# Altium PCB [CC2538] PCB.PcbDoc
Units mil, origin at the board's own origin, x right, y up, seen from the top; angles counter-clockwise.
Board outline 2400.22 x 2575.34 mil, 2 copper layers (Top Layer, Bottom Layer); 52 components, 70 nets, 222 pads, 19 vias.
Unrouted connection lines stored in the file: 7.
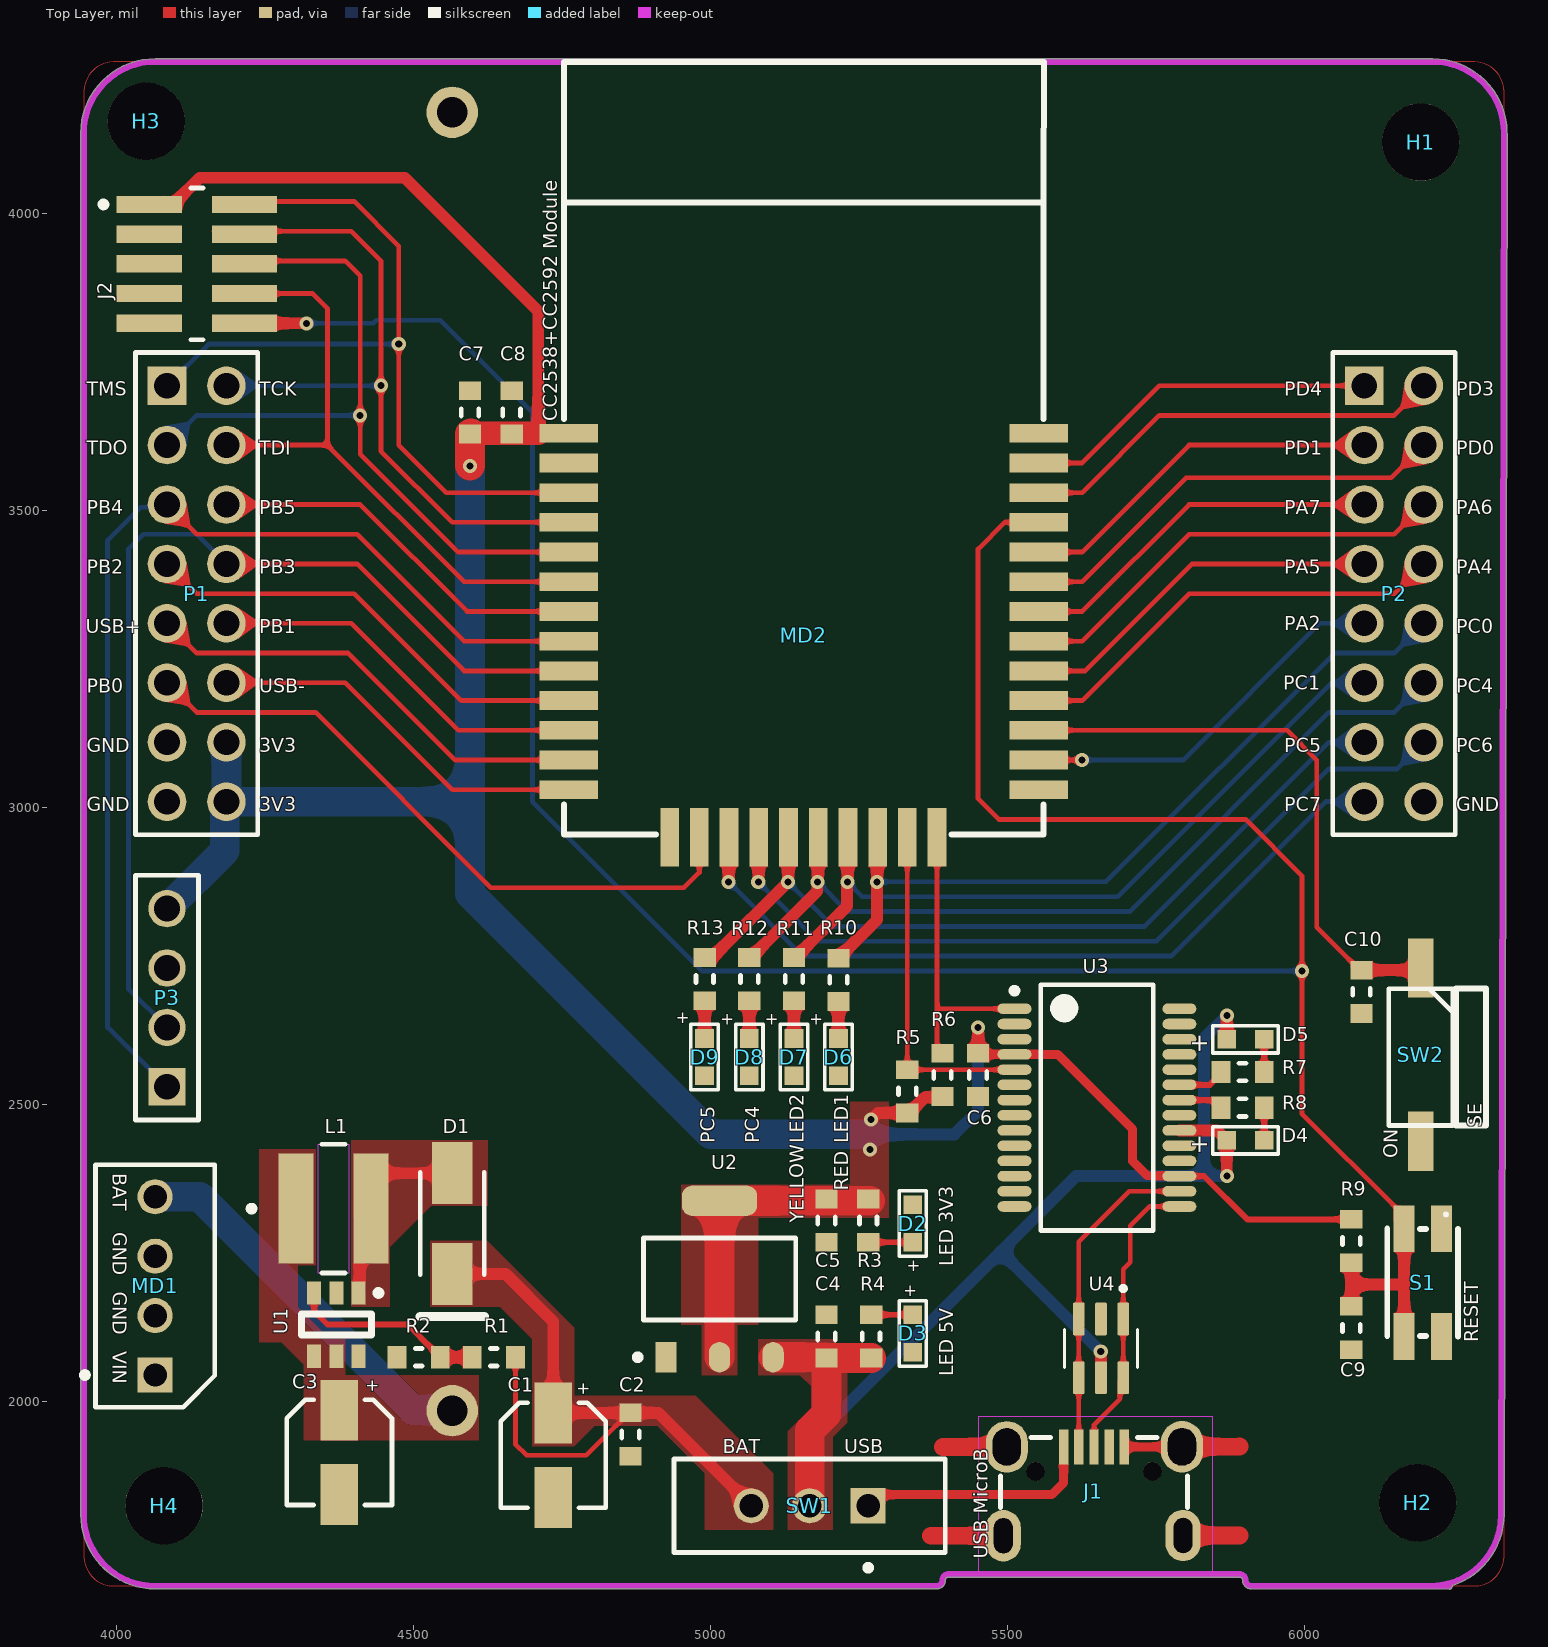
[diagram p0: Top Layer view]
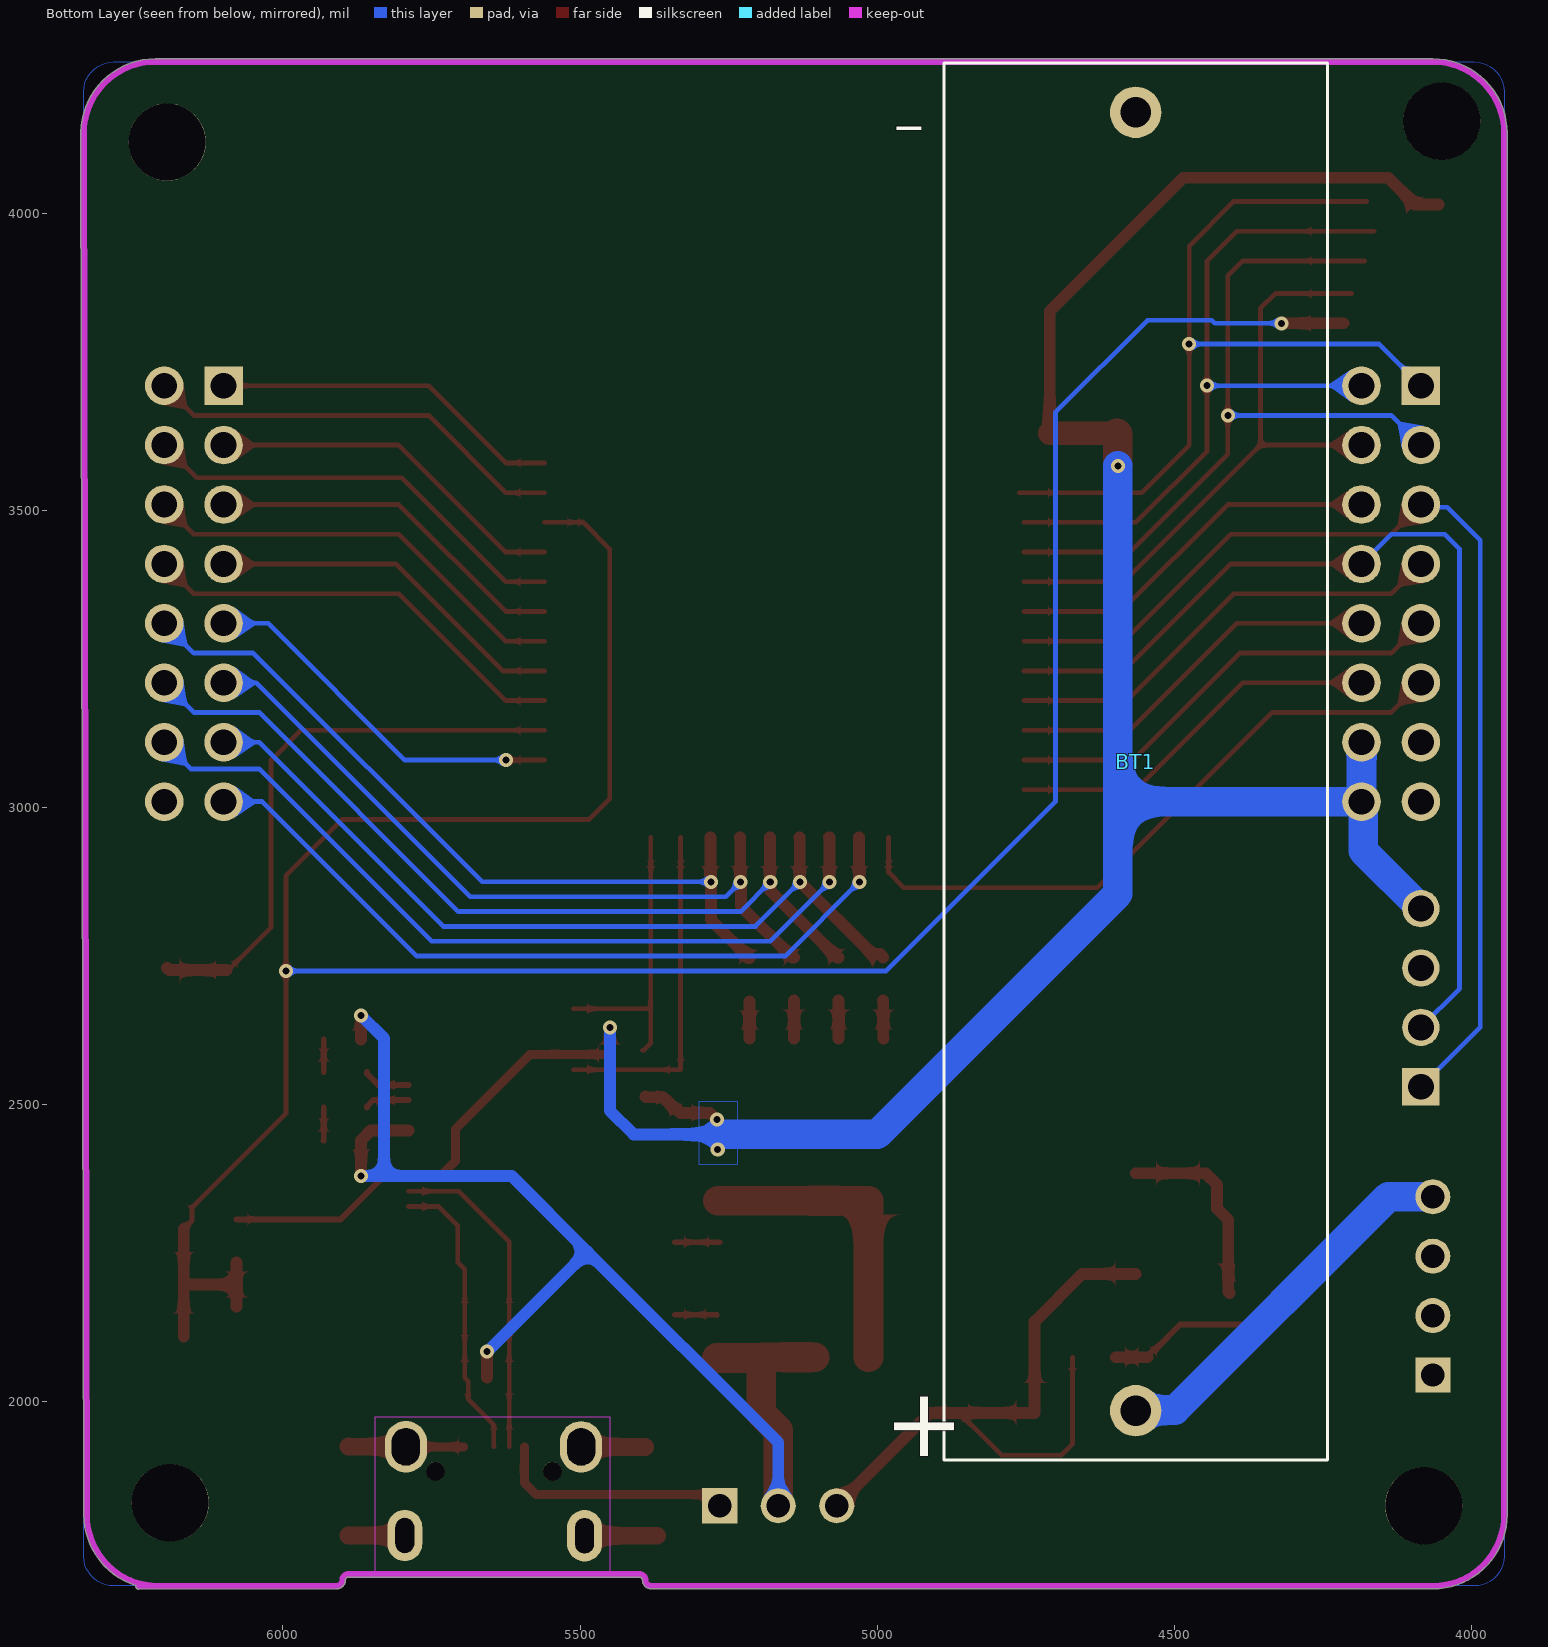
[diagram p1: Bottom Layer view, seen from below]
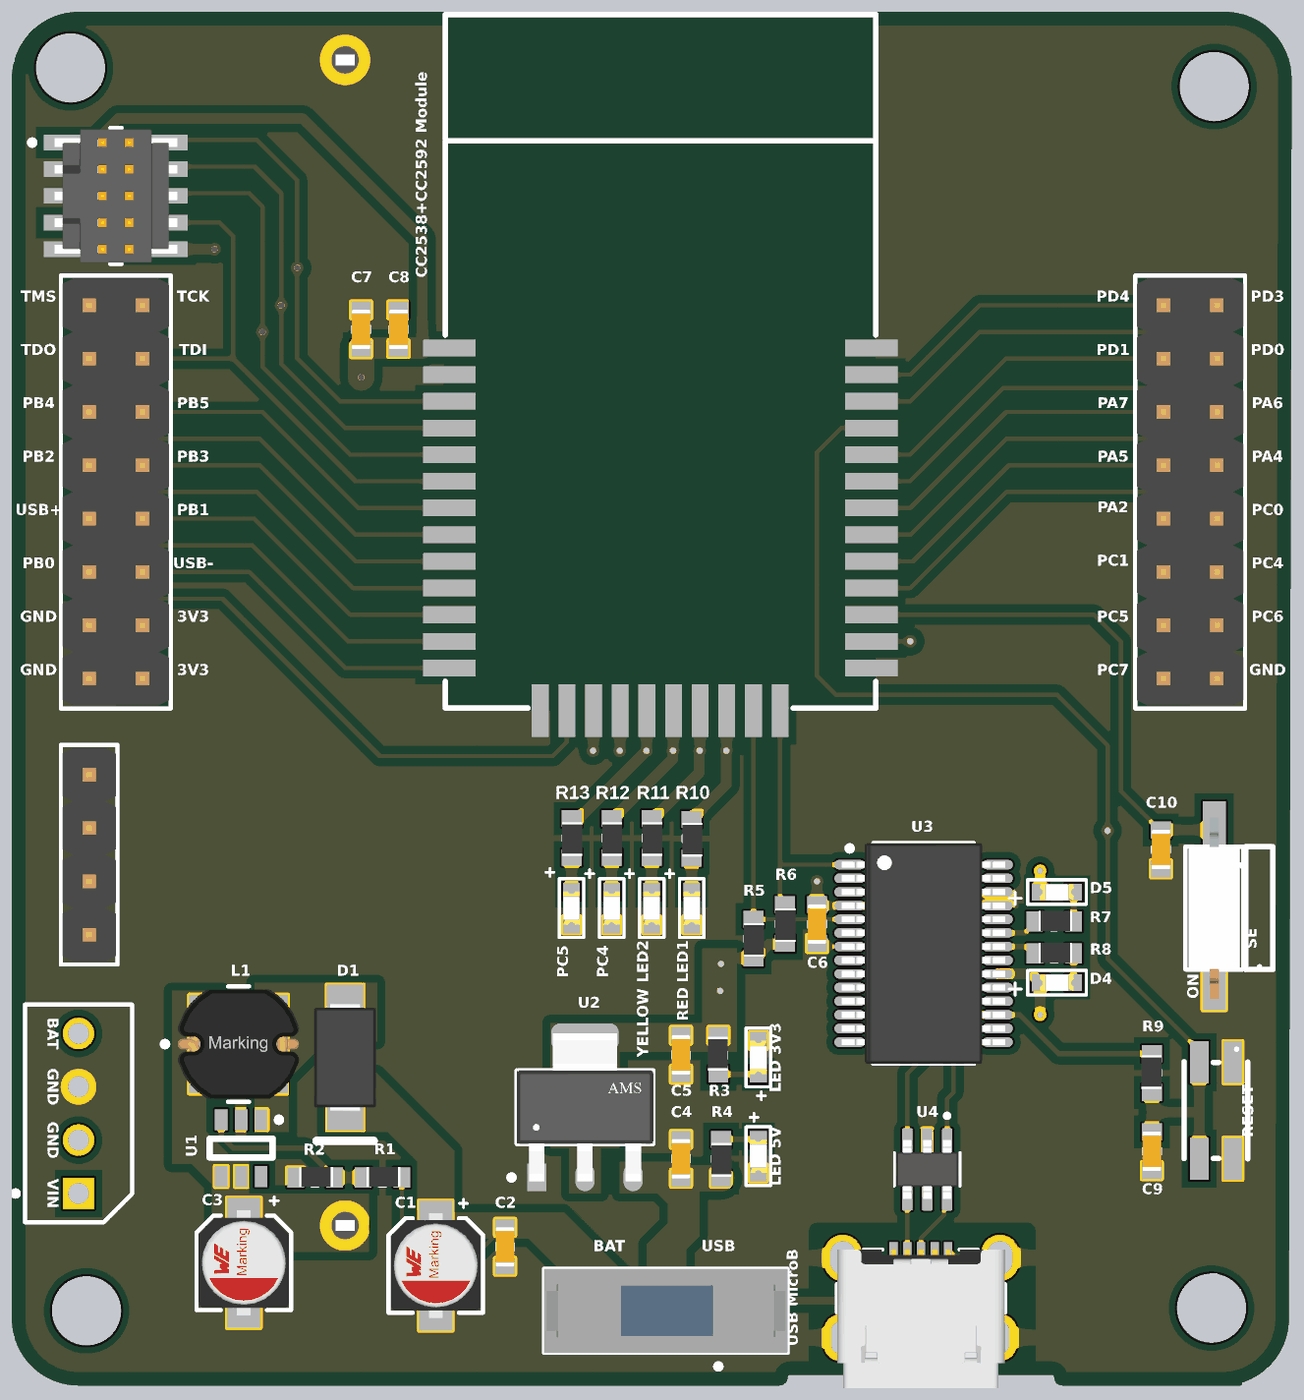
[diagram p2: 3D render of the assembled board from above, using the file's embedded part models]

## Layer stack, top to bottom
Top Solder: solder mask 0.4, Solder Resist, Dk 3.5
Top Layer: signal copper 1.4
Dielectric 1: dielectric 12.6, FR-4, Dk 4.8
Bottom Layer: signal copper 1.4
Bottom Solder: solder mask 0.4, Solder Resist, Dk 3.5

## Board outline
3939.99,1810 ccw(c4065,1810) 4065,1684.98 4065.03,1684.99 5380,1684.98 ccw(c5380,1700) 5395.02,1700 cw(c5400,1700) 5400,1704.98 5890,1704.98 cw(c5890,1700) 5894.98,1700 ccw(c5910,1700) 5909.99,1684.98 6242.61,1684.68 ccw(c6242.61,1689.69) 6247.63,1689.69 6247.52,1690.75 ccw(c6210,1810) 6335.02,1809.99 6340.21,4134.99 6340.01,4136.4 ccw(c6215,4135) 6215,4260.02 4065,4260.02 4064.95,4260.02 ccw(c4065,4135) 3939.99,4135.06 3939.98,4135

## Design rules (kind name [scope] priority, off if disabled: settings)
Clearance Clearance_4 [InNamedPolygon('NONET_L02_P009')] p1: gap=15 ignorepadtopadclearanceinfootprint=FALSE
Clearance Clearance_3 [InNamedPolygon('NONET_L01_P009')] p2: gap=15 ignorepadtopadclearanceinfootprint=FALSE
Clearance Clearance_2 [InNamedPolygon('NONET_L01_P013')] p3: gap=15 ignorepadtopadclearanceinfootprint=FALSE
Clearance Clearance_1 [InNamedPolygon('NONET_L01_P013')] p4: gap=15 ignorepadtopadclearanceinfootprint=FALSE
Clearance [All] p5: gap=6 ignorepadtopadclearanceinfootprint=FALSE
PolygonConnect PolygonConnect_6 [All vs IsNamedPolygon('3V3_L01_P008') Or IsNamedPolygon('5V_BAT_L01_P003') Or IsNamedPolygon('5V_L01_P005') Or IsNamedPolygon('NONET_L01_P013') Or IsNamedPolygon('NETD1_1_L01_P002') Or IsNamedPolygon('VBAT_L01_P001') Or IsNamedPolygon('3V3_L02_P006') Or IsNamedPolygon('NONET_L02_P009')] p1: thpad.connectstyle=Direct thpad.reliefconductorwidth=10 thpad.reliefentries=4 thpad.polygonreliefangle="90 Angle" thpad.airgapwidth=10 smdpad.connectstyle=Direct smdpad.reliefconductorwidth=10 smdpad.reliefentries=4 smdpad.polygonreliefangle="90 Angle" smdpad.airgapwidth=10 via.connectstyle=Relief via.reliefconductorwidth=10 via.reliefentries=4 via.polygonreliefangle="90 Angle" via.airgapwidth=10
PolygonConnect PolygonConnect_5 [All vs IsNamedPolygon('NONET_L01_P013')] p2: thpad.connectstyle=Direct thpad.reliefconductorwidth=10 thpad.reliefentries=4 thpad.polygonreliefangle="90 Angle" thpad.airgapwidth=10 smdpad.connectstyle=Direct smdpad.reliefconductorwidth=10 smdpad.reliefentries=4 smdpad.polygonreliefangle="90 Angle" smdpad.airgapwidth=10 via.connectstyle=Relief via.reliefconductorwidth=10 via.reliefentries=4 via.polygonreliefangle="90 Angle" via.airgapwidth=10
PolygonConnect PolygonConnect_4 [All vs IsNamedPolygon('3V3_L01_P008') Or IsNamedPolygon('5V_BAT_L01_P003') Or IsNamedPolygon('5V_L01_P005') Or IsNamedPolygon('NONET_L01_P013') Or IsNamedPolygon('NETD1_1_L01_P002') Or IsNamedPolygon('VBAT_L01_P000') Or IsNamedPolygon('3V3_L02_P006') Or IsNamedPolygon('NONET_L02_P009')] p3: thpad.connectstyle=Direct thpad.reliefconductorwidth=10 thpad.reliefentries=4 thpad.polygonreliefangle="90 Angle" thpad.airgapwidth=10 smdpad.connectstyle=Direct smdpad.reliefconductorwidth=10 smdpad.reliefentries=4 smdpad.polygonreliefangle="90 Angle" smdpad.airgapwidth=10 via.connectstyle=Relief via.reliefconductorwidth=10 via.reliefentries=4 via.polygonreliefangle="90 Angle" via.airgapwidth=10
PolygonConnect PolygonConnect_3 [All vs IsNamedPolygon('NONET_L01_P013')] p4: thpad.connectstyle=Direct thpad.reliefconductorwidth=10 thpad.reliefentries=4 thpad.polygonreliefangle="90 Angle" thpad.airgapwidth=10 smdpad.connectstyle=Direct smdpad.reliefconductorwidth=10 smdpad.reliefentries=4 smdpad.polygonreliefangle="90 Angle" smdpad.airgapwidth=10 via.connectstyle=Relief via.reliefconductorwidth=10 via.reliefentries=4 via.polygonreliefangle="90 Angle" via.airgapwidth=10
PolygonConnect PolygonConnect_2 [All vs IsNamedPolygon('3V3_L01_P008') Or IsNamedPolygon('5V_BAT_L01_P003') Or IsNamedPolygon('5V_L01_P005') Or IsNamedPolygon('NETD1_1_L01_P002') Or IsNamedPolygon('VBAT_L01_P000')] p5: thpad.connectstyle=Direct thpad.reliefconductorwidth=10 thpad.reliefentries=4 thpad.polygonreliefangle="90 Angle" thpad.airgapwidth=10 smdpad.connectstyle=Direct smdpad.reliefconductorwidth=10 smdpad.reliefentries=4 smdpad.polygonreliefangle="90 Angle" smdpad.airgapwidth=10 via.connectstyle=Relief via.reliefconductorwidth=10 via.reliefentries=4 via.polygonreliefangle="90 Angle" via.airgapwidth=10
PolygonConnect PolygonConnect_1 [All vs IsNamedPolygon('5V_BAT_L01_P003') Or IsNamedPolygon('NETD1_1_L01_P002') Or IsNamedPolygon('VBAT_L01_P000')] p6: thpad.connectstyle=Direct thpad.reliefconductorwidth=10 thpad.reliefentries=4 thpad.polygonreliefangle="90 Angle" thpad.airgapwidth=10 smdpad.connectstyle=Direct smdpad.reliefconductorwidth=10 smdpad.reliefentries=4 smdpad.polygonreliefangle="90 Angle" smdpad.airgapwidth=10 via.connectstyle=Relief via.reliefconductorwidth=10 via.reliefentries=4 via.polygonreliefangle="90 Angle" via.airgapwidth=10
PolygonConnect [All] p7: connectstyle=Relief reliefconductorwidth=10 reliefentries=4 polygonreliefangle="90 Angle" airgapwidth=10
RoutingVias [All] p1: holewidth=28 width=50 viastyle="Through Hole" minholewidth=28 minwidth=50 maxholewidth=28 maxwidth=50
SolderMaskExpansion [All] p1: expansion=4 istentingtop=FALSE
Width [All] p1: maxlimit=50 minlimit=8 preferedwidth=10
30 further rules are at their usual default settings.

## Classes and differential pairs
component class "[CC2538] Power Circuit": BT1 C1 C2 C3 C4 C5 D1 D2 D3 L1 MD1 R1 R2 R3 R4 SW1 U1 U2
component class "[CC2538] MCU": C7 C8 C9 C10 D6 D7 D8 D9 H1 H2 H3 H4 J2 MD2 P1 P2 P3 R9 R10 R11 R12 R13 S1 SW2
component class "[CC2538] Flashing - FTDI": C6 D4 D5 J1 R5 R6 R7 R8 U3 U4

## Components (designator, comment, footprint, x,y, rotation, side; value= is the part's Value field where it differs from the comment)
BT1 "BCAAPC" BCAAC 4560,3087.48 r270 bottom
C1 "865080340003" WCAP-ASLI_D4H5.5 4735,1910 r90 top value=22µF
C2 "0106031051016" CAP_0603 4865,1945 r90 top value=1µF
C3 "865080340003" WCAP-ASLI_D4H5.5 4375,1915 r90 top value=22µF
C4 "0106031061010" CAP_0603 5195,2110 r270 top value=10µF
C5 "0106031061010" CAP_0603 5195,2305 r90 top value=10µF
C6 "0106031041050" CAP_0603 5450,2550 r90 top value=100nF
C7 "0106031051016" CAP_0603 4595,3665 r270 top value=1µF
C8 "0106031041050" CAP_0603 4665,3665 r270 top value=100nF
C9 "0106031041050" CAP_0603 6078.09,2124.13 r270 top value=100nF
C10 "0106031041050" CAP_0603 6095,2690 r270 top value=100nF
D1 "SS210" SS210-Footprint-SMA 4565,2300 r270 top
D2 "160603GreenBlur" WL-SMCW_0603_H=0.7mm#1 5340,2300 r270 top value="Green, 3.2V"
D3 "160603GreenBlur" WL-SMCW_0603_H=0.7mm#1 5340,2115 r90 top value="Green, 3.2V"
D4 "160603GreenBlur" WL-SMCW_0603_H=0.7mm#1 5900,2440 r180 top value="Green, 3.2V"
D5 "160603GreenBlur" WL-SMCW_0603_H=0.7mm#1 5900,2610 r180 top value="Green, 3.2V"
D6 "160603RedClear" WL-SMCW_0603_H=0.7mm#1 5215,2580 r90 top value="Red, 2V"
D7 "160603YellowClear" WL-SMCW_0603_H=0.7mm#1 5140,2580 r90 top value="Yellow, 2V"
D8 "160603GreenClear" WL-SMCW_0603_H=0.7mm#1 5065,2580 r90 top value="Green, 3.2V"
D9 "160610OrangeClear" WL-SMCW_0603_H=0.7mm#2 4990,2580 r90 top
H1 "Tooling Hole 3mm" 3mm 6195,4120 r0 top
H2 "Tooling Hole 3mm" 3mm 6190,1830 r0 top
H3 "Tooling Hole 3mm" 3mm 4050,4155 r0 top
H4 "Tooling Hole 3mm" 3mm 4080,1825 r0 top
J1 "629105150521" 629105150521 5645,1810 r0 top
J2 "FTSH-105-01-L-DV-K-P-TR" FP-FTSH-105-01-L-DV-K-P-T-MFG 4135.12,3915 r270 top
L1 "78477410" "WE-PD2A_4D28 (4730)" 4365,2325 r0 top
MD1 "LI-ION_BATT_CHARGER_CN3791" LI-ION_BATT_CHARGER_CN3791-Footprint-1 4065,2195 r270 top
MD2 "WAVGAT-CC2538-CC2592" WAVGAT-CC2538-CC2592-Footprint 4752.91,2955 r0 top
P1 "61301621121" 61301621121 4135,3360 r270 top value="3A, 250 V (AC)"
P2 "61301621121" 61301621121 6150,3360 r270 top value="3A, 250 V (AC)"
P3 "61300411121" 61300411121 4085,2680 r90 top value="3A, 250 V (AC)"
R1 "0006032231" RES_0603 4635,2075 r0 top value=22k
R2 "0006033121" RES_0603 4508.58,2075 r0 top value=3.1k
R3 "0006031021" RES_0603 5265,2305 r90 top value=1k
R4 "0006031021" RES_0603 5270,2110 r270 top value=1k
R5 "0006031031" RES_0603 5330.91,2522.56 r270 top value=10k
R6 "0006031031" RES_0603 5390,2550 r270 top value=10k
R7 "0006031021" RES_0603 5895,2555 r0 top value=1k
R8 "0006031021" RES_0603 5895,2495 r0 top value=1k
R9 "0006031031" RES_0603 6078.09,2270.55 r90 top value=10k
R10 "0006031021" RES_0603 5215,2710 r270 top value=1k
R11 "0006031021" RES_0603 5140,2711.42 r270 top value=1k
R12 "0006031021" RES_0603 5065,2711.42 r270 top value=1k
R13 "0006031021" RES_0603 4990,2711.42 r270 top value=1k
S1 "Tactile Switch-3x4x2.5" "Tactile Switch-3x4x2.5 Footprint" 6198.5,2200.55 r90 top
SW1 "EG1218" ESWI-EG1218_V 5166.57,1825 r180 top locked
SW2 "Dip Switch 1 2.54" "Dip Switch 1 2.54-Footprint-1" 6195,2580 r180 top locked
U1 "MT3608" SOT95P280X145-6N 4370,2130 r270 top
U2 "AMS1117-3.3" FP-AMS1117-IPC_B 5014.84,2206.69 r90 top
U3 "FT232RL-REEL" FTDI-SSOP-28_L 5650,2495 r0 top
U4 "USBLC6-2SC6" USBLC6-2SC6-Footprint-1 5656.81,2090 r270 top

## Footprints (in the part's own frame and the unit in brackets; to place one, negate y for a bottom-side part, rotate by r counter-clockwise, add the part's x,y. Pads: shape width x height; smd on the part's side, far side on the other; paste and mask are expansions set on the pad)
3mm [mm]
  round 3.3 hole 3.3 unplated: 0(0,0)
61300411121 [mm] "Pin Header, pitch 2.54 mm, THT, Vertical, single row, 4p"
  rect 1.6x1.6 hole 1.1: 1(-3.81,0)
  round 1.6 hole 1.1: 2(-1.27,0) 3(1.27,0) 4(3.81,0)
  silkscreen extent -5.23,-1.35 5.23,1.35, body extent -5.08,-1.27 5.08,1.27, height 8.57
61301621121 [mm] "Pin Header, pitch 2.54 mm, THT, Vertical, dual row, 16p"
  rect 1.65x1.65 hole 1.1: 1(-8.89,-1.27)
  round 1.65 hole 1.1: 2(-8.89,1.27) 3(-6.35,-1.27) 4(-6.35,1.27) 5(-3.81,-1.27) 6(-3.81,1.27) 7(-1.27,-1.27) 8(-1.27,1.27) 9(1.27,-1.27) 10(1.27,1.27) 11(3.81,-1.27) 12(3.81,1.27) 13(6.35,-1.27) 14(6.35,1.27) 15(8.89,-1.27) 16(8.89,1.27)
  silkscreen extent -10.31,-2.62 10.31,2.62, body extent -10.16,-2.54 10.16,2.54, height 8.59
629105150521 [mm]
  rect 0.4x1.5 smd: 1(-1.3,2.9) 2(-0.65,2.9) 3(0,2.9) 4(0.65,2.9) 5(1.3,2.9)
  round 0.8 hole 0.8 unplated: MH1(-2.5,1.85) MH2(2.5,1.85)
  oval 1.5x2.2 hole 0.8 slot 1.5 at 90 deg: Shell(-3.875,-0.9) Shell(3.81,-0.889)
  oval 1.8x2.2 hole 1.2 slot 1.6 at 90 deg: Shell(-3.725,2.9) Shell(3.763,2.903)
  silkscreen extent -4,0.3 4,3.3, body extent -4,-3.3 4,3.3, height 2.75
BCAAC [mm] "Battery Holder (Open) AA 1 Cell PC Pin"
  round 2.2 hole 1.3: 1(28.004,-0.127) 2(-27.496,-0.127)
  silkscreen extent -29.6,-8.33 30.1,8.07, body extent -29.6,-8.33 30.1,8.07, height 13.25
CAP_0603 [mm] "Chip Capacitor, 2-Leads, Body 1.80x0.80mm, IPC Medium Density"
  rect 0.8x0.95 smd: 1(-0.925,0) 2(0.925,0)
  silkscreen extent -0.15,-0.38 0.15,0.38, body extent -0.95,-0.45 0.95,0.45, height 0.9
"Dip Switch 1 2.54-Footprint-1" [mm]
  rect 1.1x2.54 smd: 1(0,-3.81) 2(0,3.59)
  silkscreen extent -1.37,-2.93 1.37,2.93, body extent -1.22,-4.32 1.22,4.32, height 2.65
ESWI-EG1218_V [mm] "THD, 3-Leads, Body 11.6x4mm, Pitch 2.5mm"
  rect 1.5x1.5 hole 1: 1(-2.5,0)
  round 1.5 hole 1: 2(0,0) 3(2.5,0)
  silkscreen extent -5.8,-2 5.8,2.77, body extent -5.8,-2 5.8,2, height 7.4
FP-AMS1117-IPC_B [mm]
  rect 1.304x0.912 smd paste+0 mask+0: 1(-3.345,2.29)
  rrect100% 1.304x0.912 smd paste+0 mask+0: 2(-3.345,0) 3(-3.345,-2.29)
  rrect70% 1.304x3.222 smd paste+0 mask+0: 4(3.345,0)
  silkscreen extent -3.47,-3.25 1.75,3.62, body extent -4.25,-3.5 4.25,3.5, height 0.25
FP-FTSH-105-01-L-DV-K-P-T-MFG [mm]
  rect 0.74x2.79 smd paste+0 mask+0: 1(-2.54,-2.035) 2(-2.54,2.035) 3(-1.27,-2.035) 4(-1.27,2.035) 5(0,-2.035) 6(0,2.035) 7(1.27,-2.035) 8(1.27,2.035) 9(2.54,-2.035) 10(2.54,2.035)
  silkscreen extent -3.24,-4.11 3.24,0.27, body extent -3.34,-3.53 3.34,3.53, height 0.25
FTDI-SSOP-28_L [mm] "SOP, 28-Leads, Body 10.5x5.6mm, Pitch 0.65mm, IPC High Density"
  oval 1.45x0.45 smd: 1(-3.525,4.225) 2(-3.525,3.575) 3(-3.525,2.925) 4(-3.525,2.275) 5(-3.525,1.625) 6(-3.525,0.975) 7(-3.525,0.325) 8(-3.525,-0.325) 9(-3.525,-0.975) 10(-3.525,-1.625) 11(-3.525,-2.275) 12(-3.525,-2.925) 13(-3.525,-3.575) 14(-3.525,-4.225) 15(3.525,-4.225) 16(3.525,-3.575) 17(3.525,-2.925) 18(3.525,-2.275) 19(3.525,-1.625) 20(3.525,-0.975) 21(3.525,-0.325) 22(3.525,0.325) 23(3.525,0.975) 24(3.525,1.625) 25(3.525,2.275) 26(3.525,2.925) 27(3.525,3.575) 28(3.525,4.225)
  silkscreen extent -3.65,-5.25 2.4,5.25, body extent -3.9,-5.25 3.9,5.25, height 2
LI-ION_BATT_CHARGER_CN3791-Footprint-1 [mm]
  rect 1.5x1.5 hole 1: 1(3.81,0)
  round 1.5 hole 1: 2(1.27,0) 3(-1.27,0) 4(-3.81,0)
  silkscreen extent -5.18,-3.12 5.18,2.55
RES_0603 [mm] "Chip Resistor, 2-Leads, Body 1.55x0.85mm, IPC Medium Density"
  rect 0.8x0.95 smd: 1(-0.925,0) 2(0.925,0)
  silkscreen extent -0.15,-0.38 0.15,0.38, body extent -0.75,-0.45 0.85,0.5, height 0.5
SOT95P280X145-6N [mm] "SOT23, 6-Leads, Body 2.90x2.80mm, Pitch 0.95mm, IPC Medium Density"
  rect 1x0.6 smd: 1(-1.35,0.95) 2(-1.35,0) 3(-1.35,-0.95) 4(1.35,-0.95) 5(1.35,0) 6(1.35,0.95)
  silkscreen extent -1.47,-1.5 0.45,1.93, body extent -0.85,-1.5 0.85,1.5, height 1.45
SS210-Footprint-SMA [mm]
  rect 2.65x1.75 smd: 1(-2.15,0) 2(2.15,0)
  silkscreen extent -2.19,-1.36 3.98,1.36, body extent -2.6,-1.48 2.6,1.48, height 2.7
"Tactile Switch-3x4x2.5 Footprint" [mm]
  rect 2x0.9 smd: 1(-2.3,0.8) 2(2.3,0.8) 3(2.3,-0.8) 4(-2.3,-0.8)
  silkscreen extent -2.3,-1.5 2.31,1.52
USBLC6-2SC6-Footprint-1 [mm]
  rrect25% 1.4x0.5 smd: 1(-1.255,0.95) 2(-1.255,0) 3(-1.255,-0.95) 4(1.255,-0.95) 5(1.255,0) 6(1.255,0.95)
  silkscreen extent -2.65,-1.57 0.81,1.57, body extent -1.4,-1.46 1.4,1.46, height 1.44
WAVGAT-CC2538-CC2592-Footprint [mm]
  rect 2.5x0.8 smd paste+0 mask+0: 1(0.2,17.145) 2(0.2,15.875) 3(0.2,14.605) 4(0.2,13.335) 5(0.2,12.065) 6(0.2,10.795) 7(0.2,9.525) 8(0.2,8.255) 9(0.2,6.985) 10(0.2,5.715) 11(0.2,4.445) 12(0.2,3.175) 13(0.2,1.905) 24(20.3,1.905) 25(20.3,3.175) 26(20.3,4.445) 27(20.3,5.715) 28(20.3,6.985) 29(20.3,8.255) 30(20.3,9.525) 31(20.3,10.795) 32(20.3,12.065) 33(20.3,13.335) 34(20.3,14.605) 35(20.3,15.875) 36(20.3,17.145)
  rect 0.8x2.5 smd paste+0 mask+0: 14(4.521,-0.127) 15(5.791,-0.127) 16(7.061,-0.127) 17(8.331,-0.127) 18(9.601,-0.127) 19(10.871,-0.127) 20(12.141,-0.127) 21(13.411,-0.127) 22(14.681,-0.127) 23(15.951,-0.127)
  silkscreen extent 0,0 20.51,33.02
WCAP-ASLI_D4H5.5 [mm] "Aluminium Electrolytic V-Chip SMT Capacitors, 4x5.5mm"
  rect 2.6x1.6 smd: 1(1.8,0) 2(-1.8,0)
  silkscreen extent -2.25,-2.25 2.25,2.25, body extent -2.5,-2.15 2.5,2.15, height 5.5
"WE-PD2A_4D28 (4730)" [mm]
  rect 1.5x4.7 smd: 1(-1.6,0) 2(1.6,0)
  Top Layer keep-out region: -0.65,2.75 0.65,2.75 0.65,-2.75 -0.65,-2.75
  silkscreen extent -3.62,-2.75 0.5,2.75, body extent -2.9,-2.6 2.89,2.6, height 4.5
WL-SMCW_0603_H=0.7mm#1 [mm] "SMD Mono-color Chip LED, body 1.6x0.8mm"
  rect 0.8x0.8 smd: 1(-0.8,0) 2(0.8,0)
  silkscreen extent -1.4,-0.58 1.4,0.58, body extent -0.8,-0.4 0.8,0.4, height 0.7
WL-SMCW_0603_H=0.7mm#2 [mm] "SMD Mono-color Chip LED, body 1.6x0.8mm"
  rect 0.8x0.8 smd: 1(-0.8,0.008) 2(0.8,0.008)
  silkscreen extent -1.4,-0.58 1.4,0.59, body extent -0.8,-0.39 0.8,0.41, height 0.7

## Part data
BT1: library part CMP-00029-00002-3, "Battery Holder (Open) AA 1 Cell PC Pin", Supplier Locally Name=Thegioiic, Supplier Locally URL=https://www.thegioiic.com/hop-pin-1xaa-xuyen-lo-han-pcb
C1 C3: library part CMP-001-00129-2, "V-Chip, D4 x H5.5mm, 22uF, 16V", Capacitance Tolerance=+/-20%, Leakage Current=3.52uA, Manufacturer="Wurth Elektronik", Manufacturer Part Number=N/A, Operating Temperature Max=105°C, Operating Temperature Min=-55°C, Rated Voltage (DC)=16V, Ripple Current=90mA, Category="Aluminum Electrolytic Capacitors", Component Type=Standard, Design Item ID=865080340003, Diameter=4mm, Dissipation Factor=16%, Endurance=2000h, Height=5.5mm, Mount="Surface Mount", Packaging="Tape and Reel", Pins=2, Source=Al_Cap.SchLib, Supplier 1 Name=Mouser, Supplier 1 SN=710-865080340003, Supplier 1 URL=https://www.mouser.com/ProductDetail/Wurth-Elektronik/865080340003?qs=0KOYDY2FL2%252BowmC4S50IuQ%3D%3D, Supplier 2 Name=Digi-Key, Supplier 2 SN=N/A, Supplier 2 URL=N/A, Supplier 3 Name=thegioiic, Supplier 3 SN=N/A, Supplier 3 URL=https://www.thegioiic.com/tu-nhom-smd-22uf-16v-4x5-4mm
C2 C7: library part CMP-001-00177-2, "CAP, size 0603, 1 uF, 16 VDC, 10%", Case/Package=0603, LCSC Part #=C1592, Manufacturer="Samsung Electro-Mechanics", Manufacturer Part Number=CL10B105KO8NNWC, Operating Temperature Max="+ 85 C", Operating Temperature Min="- 40 C", Supplier 1 Part Number=187-CL10B105KO8NNWC, Supplier 2 Part Number=1276-CL10B105KO8NNWCTR-ND, Supplier 3 Part Number=N/A, Tolerance=10%, Voltage Rating DC="16 VDC", Component Type=Standard, ComponentLink1Description=Datasheet, ComponentLink1URL=https://www.mouser.vn/datasheet/2/585/Samsung_MLCC_1837944-1929650.pdf, Design Item ID=0106031051016, Mount=SMD/SMT, Packaging="Tape and Reel", Pins=2, Source=Capacitor_0603_10_percent.SchLib, Supplier 1 URL=https://www.mouser.vn/ProductDetail/Samsung-Electro-Mechanics/CL10B105KO8NNWC?qs=81r%252BiQLm7BT%252BXtc72qn1ug%3D%3D&utm_source=mouser-refine-download&utm_medium=file&utm_campaign=CL10B105KO8NNWC&utm_content=Samsung-Electro-Mechanics, Supplier 2 URL=https://www.digikey.com/en/products/detail/samsung-electro-mechanics/cl10b105ko8nnwc/16572783, Supplier 3 URL=https://www.thegioiic.com/tu-gom-0603-1uf-16v
C4 C5: library part CMP-001-00181-2, "CAP, size 0603, 10 uF, 10 VDC, 10%", Case/Package=0603, LCSC Part #=C19702, Manufacturer="Samsung Electro-Mechanics", Manufacturer Part Number=CL10A106KP8NNNC, Operating Temperature Max="+ 85 C", Operating Temperature Min="- 40 C", Supplier 1 Part Number=187-CL10A106KP8NNNC, Supplier 2 Part Number=1276-1192-2-ND, Supplier 3 Part Number=N/A, Tolerance=10%, Voltage Rating DC="10 VDC", Component Type=Standard, ComponentLink1Description=Datasheet, ComponentLink1URL=https://www.mouser.vn/datasheet/2/585/MLCC-1837944.pdf, Design Item ID=0106031061010, Mount=SMD/SMT, Packaging="Tape and Reel", Pins=2, Source=Capacitor_0603_10_percent.SchLib, Supplier 1 URL=https://www.mouser.vn/ProductDetail/Samsung-Electro-Mechanics/CL10A106KP8NNNC?qs=X6jEic%2FHinAlyfRHj7fKwg%3D%3D, Supplier 2 URL=https://www.digikey.com/en/products/detail/samsung-electro-mechanics/cl10a106kp8nnnc/3886850, Supplier 3 URL=https://www.thegioiic.com/tu-gom-0603-10uf-25v
C6 C8 C9 C10: library part CMP-001-00176-2, "CAP, size 0603, 100 nF, 50 VDC, 10%", Case/Package=0603, LCSC Part #=C14663, Manufacturer=TDK, Manufacturer Part Number=CGA3E3X8R1H104K080AE, Operating Temperature Max="+ 85 C", Operating Temperature Min="- 40 C", Supplier 1 Part Number=810-CGA3E3X8R1H104KA, Supplier 2 Part Number=445-173697-2-ND, Supplier 3 Part Number=N/A, Tolerance=10%, Voltage Rating DC="50 VDC", Component Type=Standard, ComponentLink1Description=Datasheet, ComponentLink1URL=https://product.tdk.com/system/files/dam/doc/product/capacitor/ceramic/mlcc/catalog/mlcc_automotive_soft_en.pdf?ref_disty=mouser, Design Item ID=0106031041050, Mount=SMD/SMT, Packaging="Tape and Reel", Pins=2, Source=Capacitor_0603_10_percent.SchLib, Supplier 1 URL=https://www.mouser.com/ProductDetail/TDK/CGA3E3X8R1H104K080AE?qs=nQSIdc08i%252Bd8g3IRRgU2bw%3D%3D&utm_source=mouser-refine-download&utm_medium=file&utm_campaign=CGA3E3X8R1H104K080AE&utm_content=TDK, Supplier 2 URL=https://www.digikey.com/en/products/detail/tdk-corporation/cga3e3x8r1h104k080ae/5809262, Supplier 3 URL=https://www.thegioiic.com/tu-gom-0603-100nf-0-1uf-50v
D1: library part CMP-004-00056-1, "Rectifier Diode, Schottky, 1 Phase, 1 Element, 1.5A, 100V V(RRM), Silicon, DO-214AA", Forward Voltage=430mV, Max Operating Temperature=150°C, Min Operating Temperature=-55°C, Pins=2, RoHS Compliant=Yes
D2 D3 D4 D5: library part CMP-004-00033-2, "WL-SMCW SMT Mono-color Chip LED Blur, size 0603, Green, 3.2V, 140deg", Color=Green, Component Type=Standard, ComponentLink1Description="Datasheet link", ComponentLink1URL=N/A, ComponentLink2Description="Supplier 1 URL", ComponentLink2URL=https://www.mouser.vn/ProductDetail/ROHM-Semiconductor/SMLD12EN1WT86?qs=qSfuJ%252Bfl%2Fd4fR%252B9yZydIwg%3D%3D, ComponentLink3Description="Supplier 2 URL", ComponentLink3URL=https://www.digikey.com/en/products/detail/rohm-semiconductor/SML-D12M8WT86/1641797, ComponentLink4Description="Supplier 3 URL", ComponentLink4URL=N/A, Design Item ID=160603GreenBlur, Pins=2, Size=0603, Source=WL-SMCW_0603.SchLib, Supplier 1 Name=Mouser, Supplier 1 SN=755-SMLD12EN1WT86, Supplier 1 URL=https://www.mouser.vn/ProductDetail/ROHM-Semiconductor/SMLD12EN1WT86?qs=qSfuJ%252Bfl%2Fd4fR%252B9yZydIwg%3D%3D, Supplier 2 Name=Digi-Key, Supplier 2 SN=511-1578-2-ND, Supplier 2 URL=https://www.digikey.com/en/products/detail/rohm-semiconductor/SML-D12M8WT86/1641797, Supplier 3 Name=ICDayRoi, Supplier 3 SN=N/A, Supplier 3 URL=N/A, Type=Blur
D6: library part CMP-004-00038-2, "WL-SMCW SMT Mono-color Chip LED Waterclear, size 0603, Red, 2V, 140deg", Color=Red, Component Type=Standard, ComponentLink1Description="Datasheet link", ComponentLink1URL=N/A, ComponentLink2Description="Supplier 1 URL", ComponentLink2URL=https://www.mouser.vn/ProductDetail/Wurth-Elektronik/150060RS75000?qs=LlUlMxKIyB3QnmZ3fw%2FVCA%3D%3D, ComponentLink3Description="Supplier 2 URL", ComponentLink3URL=https://www.digikey.com/en/products/detail/liteon/LTST-C191KRKT/386837, ComponentLink4Description="Supplier 3 URL", ComponentLink4URL=https://www.thegioiic.com/led-do-0603-dan-smd-trong-suot, Design Item ID=160603RedClear, Pins=2, Size=0603, Source=WL-SMCW_0603.SchLib, Supplier 1 Name=Mouser, Supplier 1 SN=710-150060RS75000, Supplier 1 URL=https://www.mouser.vn/ProductDetail/Wurth-Elektronik/150060RS75000?qs=LlUlMxKIyB3QnmZ3fw%2FVCA%3D%3D, Supplier 2 Name=Digi-Key, Supplier 2 SN=160-1447-2-ND, Supplier 2 URL=https://www.digikey.com/en/products/detail/liteon/LTST-C191KRKT/386837, Supplier 3 Name=ICDayRoi, Supplier 3 SN=N/A, Supplier 3 URL=https://www.thegioiic.com/led-do-0603-dan-smd-trong-suot, Type=Clear
D7: library part CMP-004-00042-2, "WL-SMCW SMT Mono-color Chip LED Waterclear, size 0603, Yellow, 2V, 140deg", Color=Yellow, Component Type=Standard, ComponentLink1Description="Datasheet link", ComponentLink1URL=N/A, ComponentLink2Description="Supplier 1 URL", ComponentLink2URL=https://www.mouser.com/ProductDetail/Wurth-Elektronik/150060YS75003?qs=Li%252BoUPsLEnvfob7qsAi9dA%3D%3D, ComponentLink3Description="Supplier 2 URL", ComponentLink3URL=https://www.digikey.com/en/products/detail/liteon/LTST-C191KSKT/386839, ComponentLink4Description="Supplier 3 URL", ComponentLink4URL=https://icdayroi.com/led-yellow-0603, Design Item ID=160603YellowClear, Pins=2, Size=0603, Source=WL-SMCW_0603.SchLib, Supplier 1 Name=Mouser, Supplier 1 SN=710-150060YS75003, Supplier 1 URL=https://www.mouser.com/ProductDetail/Wurth-Elektronik/150060YS75003?qs=Li%252BoUPsLEnvfob7qsAi9dA%3D%3D, Supplier 2 Name=Digi-Key, Supplier 2 SN=160-1448-2-ND, Supplier 2 URL=https://www.digikey.com/en/products/detail/liteon/LTST-C191KSKT/386839, Supplier 3 Name=ICDayRoi, Supplier 3 SN=N/A, Supplier 3 URL=https://icdayroi.com/led-yellow-0603, Type=Clear
D8: library part CMP-004-00034-2, "WL-SMCW SMT Mono-color Chip LED Waterclear, size 0603, Green, 3.2V, 140deg", Color=Green, Component Type=Standard, ComponentLink1Description="Datasheet link", ComponentLink1URL=N/A, ComponentLink2Description="Supplier 1 URL", ComponentLink2URL=https://www.mouser.vn/ProductDetail/Wurth-Elektronik/150060GS75000?qs=LlUlMxKIyB0UYkq5lDO8nA%3D%3D, ComponentLink3Description="Supplier 2 URL", ComponentLink3URL=https://www.digikey.com/en/products/detail/liteon/LTST-C191KGKT/386835, ComponentLink4Description="Supplier 3 URL", ComponentLink4URL=https://www.thegioiic.com/led-xanh-la-0603-dan-smd-trong-suot, Design Item ID=160603GreenClear, Pins=2, Size=0603, Source=WL-SMCW_0603.SchLib, Supplier 1 Name=Mouser, Supplier 1 SN=710-150060GS75000, Supplier 1 URL=https://www.mouser.vn/ProductDetail/Wurth-Elektronik/150060GS75000?qs=LlUlMxKIyB0UYkq5lDO8nA%3D%3D, Supplier 2 Name=Digi-Key, Supplier 2 SN=160-1446-2-ND, Supplier 2 URL=https://www.digikey.com/en/products/detail/liteon/LTST-C191KGKT/386835, Supplier 3 Name=ICDayRoi, Supplier 3 SN=N/A, Supplier 3 URL=https://www.thegioiic.com/led-xanh-la-0603-dan-smd-trong-suot, Type=Clear
D9: library part CMP-007-00036-1, Colour=Orange
H1 H2 H3 H4: library part CMP-034-000004-2, Component Type="Standard (No BOM)", Design Item ID="Tooling Hole 3mm", Pin Count=0, Source=Hole.SchLib
J1: library part CMP-002-00305-4, "Micro USB 2.0 Type B Receptacle WR-COM, Horizontal, SMT, with Pegs, High Current at Pin 1 & Pin 5"
J2: library part CMP-002-00347-1, "JTAG Connector - Board Connector, 10 Contact(s), 2 Row(s), Male, Straight, 0.05 inch Pitch, Surface Mount Terminal, Locking", Connector Type="BOARD CONNECTOR", Mounting Technology=Board, RoHS Compliant=Yes
L1: library part CMP-006-00021-3, "General Purpose Inductor", RoHS Compliant=Yes
MD1: library part CMP-00029-00007-6, "CN3791 MPPT solar charge controller module uses the CN3791 IC which’s a pulse width modulated switch-mode lithium-ion battery charge controller that can be powered by a photovoltaic cell with maximum power point tracking function"
MD2: library part CMP-021-00009-2, "WAVGAT-CC2538-CC2592 Module"
P1 P2: library part CMP-002-01084-1, "WR-PHD Pin Header, THT, pitch 2.54mm, Dual Row, Vertical, 16p", Contact Resistance=20mOhm, LCSC Part #=N/A, Manufacturer="Wurth Elektronik", Operating Temperature Max="+ 85 C", Operating Temperature Min="- 25 C", Rated Current=3A, Supplier 1 Part Number=710-61301621121, Withstanding Voltage=500VAC, Working Voltage=250VAC, Component Type=Standard, ComponentLink1Description=Datasheet, ComponentLink1URL=https://www.we-online.com/catalog/datasheet/61301621121.pdf, Design Item ID=61301621121, Gender="Pin Header", Manufacturer Part Number=61301621121, Mount=THT, Orientation=Vertical, Packaging=Bag, Pin Number=16, Pins=16, Pitch=2.54mm, Published Date="May 2020", Row Number=Dual, Source="WR-PHD_Pin Header_2.54mm.SchLib", Supplier 1 URL=https://www.mouser.vn/ProductDetail/Wurth-Elektronik/61301621121?qs=PhR8RmCirEZBHI%2Fm2diuGA%3D%3D, Supplier 2 Part Number=N/A, Supplier 2 URL=N/A, Supplier 3 Part Number=N/A, Supplier 3 URL=https://www.thegioiic.com/hang-rao-duc-doi-2-54mm-16-chan-2-hang-cao-11-2mm-xuyen-lo
P3: library part CMP-002-01000-1, "WR-PHD Pin Header, THT, pitch 2.54mm, Single Row, Vertical, 4p", Contact Resistance=20mOhm, LCSC Part #=N/A, Manufacturer="Wurth Elektronik", Operating Temperature Max="+ 85 C", Operating Temperature Min="- 25 C", Rated Current=3A, Supplier 1 Part Number=710-61300311121, Withstanding Voltage=500VAC, Working Voltage=250VAC, Component Type=Standard, ComponentLink1Description=Datasheet, ComponentLink1URL=https://www.we-online.com/catalog/datasheet/61300411121.pdf, Design Item ID=61300411121, Gender="Pin Header", Manufacturer Part Number=61300411121, Mount=THT, Orientation=Vertical, Packaging=Bag, Pin Number=4, Pins=4, Pitch=2.54mm, Published Date="May 2020", Row Number=Single, Source="WR-PHD_Pin Header_2.54mm.SchLib", Supplier 1 URL=https://www.mouser.vn/ProductDetail/Wurth-Elektronik/61300311121?qs=PhR8RmCirEYxRWFJzNKsUw%3D%3D, Supplier 2 Part Number=N/A, Supplier 2 URL=N/A, Supplier 3 Part Number=N/A, Supplier 3 URL=N/A
R1: library part CMP-009-00278-4, "RES, size 0603, 22 KOhm, 1/10 W, 1%", Case/Package=0603, LCSC Part #=N/A, Manufacturer=OEM, Operating Temperature Max="+ 85 C", Operating Temperature Min="- 40 C", Rated Power="1/10 W", Supplier 1 Part Number=667-ERJ-UP3F2202V, Supplier 2 Part Number="10-ERJ-UP3F2202VTR-ND 10-ERJ-UP3F2202VCT-ND 10-ERJ-UP3F2202VDKR-ND", Tolerance=1%, Component Type=Standard, ComponentLink1Description=Datasheet, ComponentLink1URL=https://api.pim.na.industrial.panasonic.com/file_stream/main/fileversion/4484, Design Item ID=0006032231, Manufacturer Part Number=OEM, Mount=SMD/SMT, Packaging="Tape and Reel", Pins=2, Source=Resistor_0603.SchLib, Supplier 1 URL=https://www.mouser.vn/ProductDetail/Panasonic/ERJ-UP3F2202V?qs=sGAEpiMZZMvdGkrng054twq3eZrCFN893x5tBCka%252B6wRswHHN2WaIQ%3D%3D, Supplier 2 URL=https://www.digikey.com/en/products/detail/panasonic-electronic-components/ERJ-UP3F2202V/12092693, Supplier 3 Part Number=N/A, Supplier 3 URL=N/A
R2: library part CMP-009-00309-4, "RES, size 0603, 3.1  KOhm, 1/10 W, 1%", Case/Package=0603, LCSC Part #=N/A, Manufacturer=OEM, Operating Temperature Max="+ 85 C", Operating Temperature Min="- 40 C", Rated Power="1/10 W", Supplier 1 Part Number=652-CHP0603FX3011ELF, Supplier 2 Part Number=MCT06030C3101FP500-ND, Tolerance=1%, Component Type=Standard, ComponentLink1Description=Datasheet, ComponentLink1URL=N/A, Design Item ID=0006033121, Manufacturer Part Number=OEM, Mount=SMD/SMT, Packaging="Tape and Reel", Pins=2, Source=Resistor_0603.SchLib, Supplier 1 URL=https://www.mouser.vn/ProductDetail/Bourns/CHP0603-FX-3011ELF?qs=gZXFycFWdAOzN1n7XWkwdg%3D%3D, Supplier 2 URL=https://www.digikey.com/en/products/detail/vishay-beyschlag-draloric-bc-components/MCT06030C3101FP500/8124767, Supplier 3 Part Number=N/A, Supplier 3 URL=N/A
R3 R4 R7 R8 R10 R11 R12 R13: library part CMP-009-00185-4, "RES, size 0603, 1 KOhm, 1/10 W, 1%", Case/Package=0603, LCSC Part #=C22548, Manufacturer=YAGEO, Manufacturer Part Number=RC0603FR-071KL, Operating Temperature Max="+ 85 C", Operating Temperature Min="- 40 C", Rated Power="1/10 W", Supplier 1 Part Number=603-RC0603FR-071KL, Supplier 2 Part Number=311-1.00KHRTR-ND, Supplier 3 Part Number=N/A, Tolerance=1%, Component Type=Standard, ComponentLink1Description=Datasheet, ComponentLink1URL=https://www.yageo.com/upload/media/product/productsearch/datasheet/rchip/PYu-SR_20105_RoHS_L_10.pdf, Design Item ID=0006031021, Mount=SMD/SMT, Packaging="Tape and Reel", Pins=2, Source=Resistor_0603.SchLib, Supplier 1 URL=https://www.mouser.vn/ProductDetail/YAGEO/RC0603FR-071KL?qs=VU8sRB4EgwApHsk4rF%2F3zg%3D%3D, Supplier 2 URL=https://www.digikey.com/en/products/detail/yageo/rc0603fr-071kl/726843, Supplier 3 URL=N/A
R5 R6 R9: library part CMP-009-00187-4, "RES, size 0603, 10 KOhm, 1/10 W, 1%", Case/Package=0603, LCSC Part #=C98220, Manufacturer=YAGEO, Manufacturer Part Number=RC0603FR-0710KL, Operating Temperature Max="+ 85 C", Operating Temperature Min="- 40 C", Rated Power="1/10 W", Supplier 1 Part Number=N/A, Supplier 2 Part Number=311-10.0KHRTR-ND, Tolerance=1%, Component Type=Standard, ComponentLink1Description=Datasheet, ComponentLink1URL=https://fscdn.rohm.com/en/products/databook/datasheet/passive/resistor/chip_resistor/esr-e.pdf, Design Item ID=0006031031, Mount=SMD/SMT, Packaging="Tape and Reel", Pins=2, Source=Resistor_0603.SchLib, Supplier 1 URL=N/A, Supplier 2 URL=https://www.digikey.com/en/products/detail/yageo/rc0603fr-0710kl/726880, Supplier 3 Part Number=N/A, Supplier 3 URL=N/A
S1: library part CMP-011-00013-4, "Tactile Switch, 3x4x2.5mm", Mounting Technology=SMT, Pins=4
SW1: library part CMP-011-00006-4, "Slide Switch, SPDT, 500 V, -20 to 70 degC, 3-Pin THD, RoHS, Bulk", Contact Current Rating=200mA, Manufacturer=E-Switch, Max Operating Temperature=70°C, Min Operating Temperature=-20°C, Operating Force=250gf, Package Description="3-Pin Through Hole Device, Body 11.6 x 4 mm, Pitch 2.5 mm", Package Quantity=1000, Voltage Rating (AC)=30V, Case/Package=EG1218, Contact Finish=Silver, Contact Material=Copper, Contact Plating=Silver, Current Rating=200mA, Datasheet URL=https://www.e-switch.com/system/asset/product_line/data_sheet/119/EG.pdf, Datasheet Version=Oct-15, Manufacturer URL=http://www.e-switch.ch/en/, Mounting Technology=TH, Package Reference=EG1218, Packaging=Bulk, Pins=3, RoHS Compliant=True, Throw Configuration=SPDT, Voltage Rating (DC)=30V
SW2: library part CMP-011-00016-1, "Slide Dip Switch, 1 Switches, SPST, Latched, 0.025A, 24VDC, 0 PCB Hole Cnt, Solder Terminal, Surface Mount-straight"
U1: library part CMP-019-00055-2, "1.2MHz 2A Vi=2V~24V Vo=28V(Max)", Case/Package=SOT23-6, Frequency=1.2MHz, Max Operating Temperature=85°C, Max Supply Voltage=24V, Min Operating Temperature=-40°C, Min Supply Voltage=2V, Locally Supplier Name=Thegioiic, Locally Supplier URL=https://www.thegioiic.com/mt3608-ic-dieu-chinh-tang-ap-2a-sot-23-6, Mounting Technology=SMT
U2: library part CMP-019-00052-6, "Fixed Positive LDO Regulator, 3.3V, 1.3V Dropout, PDSO3", Case/Package=SOT-223, Dropout Voltage=1.3V, Max Operating Temperature=125°C, Max Supply Voltage=15V, Min Operating Temperature=-40°C, Min Supply Voltage=4.8V, Nominal Supply Current=1A, Output Voltage=3.3V, Locally Supplier Name=Thegioiic, Locally Supplier URL=https://www.thegioiic.com/ams1117-3-3v-ic-on-ap-3-3v-1a-sot-223, Mounting Technology=SMT, Output Current=1A, Pins=3, RoHS Compliant=Yes
U3: library part CMP-015-00000-6, "USB UART IC, -0.5 to 6 V, 24 mA, -40 to 85 degC, 28-Pin SSOP, RoHS, Tape and Reel", Case/Package=SSOP, Manufacturer="Future Technology Devices International (FTDI)", Max Operating Temperature=85°C, Max Supply Voltage=5.25V, Min Operating Temperature=-40°C, Min Supply Voltage=3.3V, Nominal Supply Voltage=5V, Package Quantity=2000, Channels=1, Data Rate=3Mbps, Datasheet URL=http://datasheet.octopart.com/FT232RL-FTDI-datasheet-120501.pdf, Datasheet Version="Rev. 1.04, 02/2006", Interface=UART, Locally Supplier Name=Thegioiic, Locally Supplier URL=https://www.thegioiic.com/ft232rl-ic-usb-to-serial-uart-28-ssop, Manufacturer URL=http://www.ftdichip.com/, Packaging=TapeandReel, Pins=16, RoHS Compliant=True
U4: library part CMP-004-00055-1, "17V Clamp 5A (8/20Âµs) Ipp Tvs Diode Surface Mount SOT-23-6"

## Via types
v1: diameter 23.62, hole 11.81, Top Layer to Bottom Layer, tented both sides, 16 vias
v2: diameter 23.62, hole 11.81, Top Layer to Bottom Layer, 3 vias

## Nets (pads, with @x,y where several pads share a name; then routed paths per layer and width w, separated by ;. In a path a pad name is that pad's centre, name@x,y a point inside that pad or via, vN(x,y) a via of type N, cw(c..) or ccw(c..) an arc to the next point about the centre after c; other vN are vias at no path point)
3V3: C5.2 C6.2 C7.2 C8.2 J2.1 MD2.1 P1.14 P1.16 P3.4 R3.2 R5.2 R6.2 R9.2 U2.2 U2.4 U3.4 U3.17 | length 5240.6
  Top Layer w10: U3.17 5830.16,2379.84 5903.03,2306.97 R9.2
  Top Layer w15: C6.2 5451.85,2584.57 U3.4 5584.06,2584.57 5710,2458.62 5710,2405 5734.64,2380.36 U3.17@5788.26,2380.36
  Top Layer w20: J2.1 4095.35,4015 4099.92,4019.57 4099.92,4019.92 4140,4060 4485,4060 4505,4040 4709.67,3835.33 4709.67,3630 ; v1(5270,2475.31) 5270.98,2475.31 5281.81,2486.14 R5.2 5336.66,2491.89 5339.61,2491.89 5360.14,2512.42 5388.84,2512.42 R6.2 ; C6.2 v1(5450,2630)
  Top Layer w40: C7.2@4596.42,3630 C8.2@4665,3630 ; C8.2@4666.42,3630 4709.67,3630
  Top Layer w50: v1(4595,3575) C7.2 C7.2@4596.42,3630 ; U2.2 U2.4 R3.2@5268.03,2338.39
  Bottom Layer w20: 5270,2450 5410,2450 5450,2490 v1(5450,2630)
  Bottom Layer w50: P3.4 4182.14,2927.14 4182.14,3007.14 P1.16 ; P1.14 P1.16 ; v1(4595,3575) 4595,3010 ; 5270,2450 5000,2450 4595,2855 4595,3010 ; P1.16 4595,3010
  other v1: 5268.39,2424.74
5V: C4.2 D4.2 D5.2 R4.2 SW1.2 U2.3 U3.20 U4.5 | length 2173
  Top Layer w20: v2(5656.36,2084.36) 5656.65,2084.06 5656.65,2040.75 U4.5 ; U3.20 5851.89,2456.61 D4.2 v2(5868.5,2380) ; D5.2 v2(5868.5,2650)
  Top Layer w50: U2.3 C4.2@5193.58,2075 ; SW1.2 5166.57,1951.57 5195,1980 C4.2 R4.2
  Bottom Layer w20: SW1.2 5166.57,1931.57 5487.86,2252.86 ; v2(5656.36,2084.36) 5487.86,2252.86 ; v2(5868.5,2380) 5830,2380 ; v2(5868.5,2650) 5830,2611.5 5830,2380 ; 5487.86,2252.86 5615,2380 5830,2380
5V_BAT: C1.1 C2.2 D1.2 R1.2 SW1.3 | length 1129.9
  Top Layer w8: R1.2 4671.42,1928.58 4690,1910 4790.63,1910 4862.05,1981.42 C2.2
  Top Layer w20: D1.2 4654.65,2215.35 4735,2135 C1.1 4735.55,1981.42 C2.2@4862.05,1981.42 ; C2.2 4911.73,1981.42 SW1.3
5V_USB: J1.1 SW1.1 | length 405.3
  Top Layer w15: SW1.1 5283.82,1843.82 5573.82,1843.82 5593.82,1863.82 J1.1
GND: BT1.2 C1.2 C2.1 C3.2 C4.1 C5.1 C6.1 C7.1 C8.1 C9.2 C10.2 D2.1 D3.1 D6.1 D7.1 D8.1 D9.1 J1.5 J1.Shell J2.3 J2.5 J2.9 MD1.3 MD2.2 MD2.14 MD2.24 MD2.36 P1.13 P1.15 P2.16 P3.3 R2.1 S1.3 S1.4 SW2.2 U1.2 U2.1 U3.7 U3.18 U3.21 U3.25 U3.26 U4.2 | length 518.4
  Top Layer w15: J1.5 5793.01,1924.17 J1.Shell@5793.14,1924.3
  Top Layer w30: 5370.43,1774.57 J1.Shell@5492.44,1774.57 ; 5390.83,1924.17 J1.Shell@5498.35,1924.17 ; J1.Shell@5793.14,1924.3 5890,1925 ; J1.Shell@5795,1775 5890,1775
JTAG_TCK: J2.4 MD2.4 P1.2 | length 1239.2
  Top Layer w8: J2.4@4164.09,3970 4395,3970 4445,3920 v1(4445,3710) 4445,3600 4565,3480 MD2.4@4752.91,3480
  Bottom Layer w8: P1.2 v1(4445,3710)
JTAG_TDI: J2.8 MD2.6 P1.4 | length 1057.2
  Top Layer w8: P1.4 4355,3610 ; J2.8@4201.32,3865 4330,3865 4355,3840 4355,3610 ; MD2.6@4752.91,3380 4585,3380 4355,3610
JTAG_TDO: J2.6 MD2.5 P1.3 | length 1297.8
  Top Layer w8: J2.6@4179.52,3920 4385,3920 4410,3895 v1(4410,3660) 4410,3595 4575,3430 MD2.5@4752.91,3430
  Bottom Layer w8: P1.3 4135,3660 v1(4410,3660)
JTAG_TMS: J2.2 MD2.3 P1.1 | length 1402.9
  Top Layer w8: J2.2@4176.04,4020 4400,4020 4475,3945 v1(4475,3780) 4475,3610 4555,3530 MD2.3
  Bottom Layer w8: P1.1 4155,3780 v1(4475,3780)
NetD1_1: D1.1 L1.2 U1.1 | length 335.6
  Top Layer w20: U1.1 4409.21,2184.96 4409.21,2306.22 L1.2 4427.99,2365.12 4447.52,2384.65 D1.1
NetD2_2: D2.2 R3.1 | length 74.9
  Top Layer w10: R3.1@5265.08,2268.5 D2.2
NetD3_2: D3.2 R4.1 | length 70
  Top Layer w10: R4.1 5270.08,2146.5 D3.2
NetD4_1: D4.1 R8.2 | length 55
  Top Layer w10: R8.2 5931.42,2440.08 D4.1
NetD5_1: D5.1 R7.2 | length 55
  Top Layer w10: R7.2 D5.1@5931.42,2610
NetD6_2: D6.2 R10.2 | length 62.1
  Top Layer w20: D6.2 R10.2
NetD7_2: D7.2 R11.2 | length 63.5
  Top Layer w20: D7.2 R11.2
NetD8_2: D8.2 R12.2 | length 63.5
  Top Layer w20: D8.2 R12.2
NetD9_2: D9.2 R13.2 | length 63.6
  Top Layer w20: D9.2 4989.84,2611.65 4989.84,2674.84 R13.2
NetJ1_2: J1.2 U3.16 U4.3 U4.4 | length 549.7
  Top Layer w8: J1.2 U4.4 U4.3 5619.41,2269.41 5704.25,2354.25 U3.16
NetJ1_3: J1.3 U3.15 U4.1 U4.6 | length 493.4
  Top Layer w8: J1.3 5645.17,1924.34 5645.17,1961.01 5688.37,2004.21 5688.37,2034.75 U4.6 5694.21,2223.22 5705.98,2234.98 5705.98,2295.98 5738.66,2328.66 U3.15
NetJ1_4: J1.4
NetJ2_7: J2.7
NetMD1_1: MD1.1
NetMD1_2: MD1.2
NetR1_1: R1.1 R2.2 U1.3 | length 330.5
  Top Layer w10: U1.3 4332.6,2152.4 4355,2130 4490,2130 4531.3,2088.7 4534.25,2088.7 4545,2077.95 R2.2
  Top Layer w20: R2.2 R1.1
NetR7_1: R7.1 U3.23 | length 80.5
  Top Layer w10: U3.23 5839.92,2533.39 5858.58,2552.05 R7.1
NetR8_1: R8.1 U3.22 | length 76.3
  Top Layer w10: U3.22 5847.83,2507.8 5858.58,2497.05 R8.1
NetU1_6: U1.6
NetU3_2: U3.2
NetU3_6: U3.6
NetU3_8: U3.8
NetU3_9: U3.9
NetU3_10: U3.10
NetU3_12: U3.12
NetU3_13: U3.13
NetU3_14: U3.14
NetU3_19: U3.19
NetU3_24: U3.24
NetU3_27: U3.27
NetU3_28: U3.28
NRST: C9.1 J2.10 MD2.33 R9.1 S1.1 S1.2 | length 4776.7
  Top Layer w8: MD2.33@5560,3480 5495,3480 5450,3435 5450,3015 5485,2980 5900,2980 5995,2885 v1(5995,2725) 5995,2485 6153.29,2326.71 6153.29,2304.82 S1.2
  Top Layer w20: J2.10 v1(4320,3815) ; C9.1 6078.09,2197.34 ; R9.1 6078.09,2197.34 ; S1.1 6167.01,2200.55 ; S1.2 6167.01,2200.55 ; 6078.09,2197.34 6163.8,2197.34 6167.01,2200.55
  Bottom Layer w8: v1(4320,3815) 4432.11,3815 4437.11,3820 4545,3820 4700,3665 4700,3010 4985,2725 v1(5995,2725)
PA2: MD2.25 P2.9 | length 635.3
  Top Layer w8: MD2.25@5560,3080 v1(5625,3080)
  Bottom Layer w8: v1(5625,3080) 5795,3080 6025,3310 P2.9
PA4: MD2.27 P2.8 | length 735.3
  Top Layer w8: MD2.27@5560,3180 5625,3180 5805,3360 6150,3360 P2.8
PA5: MD2.28 P2.7 | length 614.6
  Top Layer w8: MD2.28@5560,3230 5630,3230 5810,3410 P2.7
PA6: MD2.29 P2.6 | length 735.3
  Top Layer w8: MD2.29@5560,3280 5625,3280 5805,3460 6150,3460 P2.6
PA7: MD2.30 P2.5 | length 614.6
  Top Layer w8: MD2.30@5560,3330 5625,3330 5805,3510 P2.5
PB0: MD2.15 P1.11 | length 1108.6
  Top Layer w8: P1.11 4135,3160 4335,3160 4630,2865 4955,2865 4980.91,2890.91 MD2.15
PB1: MD2.11 P1.10 | length 642.5
  Top Layer w8: P1.10 4395,3310 4575,3130 MD2.11@4752.91,3130
PB2: MD2.10 P1.7 | length 763.2
  Top Layer w8: P1.7 4135,3360 4400,3360 4580,3180 MD2.10@4752.91,3180
PB3: MD2.9 P1.8 P3.2 | length 1670.5
  Top Layer w8: P1.8 4405,3410 4585,3230 MD2.9@4752.91,3230
  Bottom Layer w8: P3.2 4020,2695 4020,3435 4045,3460 4135,3460 P1.8
PB4: MD2.8 P1.5 P3.1 | length 1849.5
  Top Layer w8: P1.5 4135,3460 4405,3460 4585,3280 MD2.8@4752.91,3280
  Bottom Layer w8: P3.1 3985,2630 3985,3450 4040.52,3505.52 4080.52,3505.52 P1.5
PB5: MD2.7 P1.6 | length 642.5
  Top Layer w8: P1.6 4410,3510 4590,3330 MD2.7@4752.91,3330
PC0: MD2.21 P2.10 R10.1 | length 1332.8
  Top Layer w20: R10.1 5217.95,2746.42 5223.7,2752.17 5223.7,2755.12 5280,2811.42 v1(5280,2875) 5280.46,2875.46 5280.46,2949.54 MD2.21
  Bottom Layer w8: v1(5280,2875) 5665,2875 6050,3260 6150,3260 P2.10
PC1: MD2.20 P2.11 R11.1 | length 1271
  Top Layer w20: R11.1 5142.95,2747.83 5229.31,2834.19 5229.31,2874.31 v1(5230,2875) 5230.46,2875.46 5230.46,2949.54 MD2.20
  Bottom Layer w8: v1(5230,2875) 5255,2850 5685,2850 6045,3210 P2.11
PC4: MD2.19 P2.12 R12.1 | length 1452.1
  Top Layer w20: R12.1 5067.95,2747.83 5179.31,2859.19 5179.31,2874.31 v1(5180,2875) 5180.46,2875.46 5180.46,2949.54 MD2.19
  Bottom Layer w8: v1(5180,2875) 5230,2825 5705,2825 6040,3160 6150,3160 P2.12
PC5: MD2.18 P2.13 R13.1 | length 1396.5
  Top Layer w20: R13.1 4995.75,2753.58 5008.58,2753.58 v1@5129.31,2874.31 ; v1(5130,2875) 5130.46,2875.46 5130.46,2949.54 MD2.18
  Bottom Layer w8: v1(5130,2875) 5205,2800 5730,2800 6040,3110 P2.13
PC6: MD2.17 P2.14 | length 1375.6
  Top Layer w20: v1(5080,2875) 5080.46,2875.46 5080.46,2949.54 MD2.17
  Bottom Layer w8: v1(5080,2875) 5180,2775 5750,2775 6040,3065 6155,3065 P2.14
PC7: MD2.16 P2.15 | length 1304.9
  Top Layer w20: v1(5030,2875) 5030.46,2875.46 5030.46,2949.54 MD2.16
  Bottom Layer w8: v1(5030,2875) 5155,2750 5775,2750 6035,3010 P2.15
PD0: MD2.31 P2.4 | length 735.3
  Top Layer w8: MD2.31@5560,3380 5625,3380 5800,3555 6145,3555 P2.4
PD1: MD2.32 P2.3 | length 614.6
  Top Layer w8: MD2.32@5560,3430 5625,3430 5805,3610 P2.3
PD3: MD2.34 P2.2 | length 714.6
  Top Layer w8: MD2.34@5560,3530 5625,3530 5755,3660 6150,3660 P2.2
PD4: MD2.35 P2.1 | length 593.8
  Top Layer w8: MD2.35@5560,3580 5625,3580 5755,3710 P2.1
ROM_BOOT_RX: MD2.23 R6.1 U3.1 | length 497.6
  Top Layer w8: MD2.23 5380.91,2665 ; R6.1@5395,2591.42 5392.66,2591.42 5380.91,2603.17 5380.91,2665 ; U3.1 5384.57,2661.34 5380.91,2665
ROM_BOOT_SEL: C10.1 MD2.26 SW2.1 | length 958.5
  Top Layer w8: MD2.26@5560,3130 5970,3130 6020,3080 6020,2798.46 C10.1@6087.05,2731.42
  Top Layer w20: C10.1 6191.42,2726.42 SW2.1
ROM_BOOT_TX: MD2.22 R5.1 U3.5 | length 571.3
  Top Layer w8: MD2.22 R5.1 U3.5
UART_NCTS: U3.11
UART_NRTS: U3.3
USBN: MD2.13 P1.12 | length 642.5
  Top Layer w8: P1.12 4385,3210 4565,3030 MD2.13@4752.91,3030
USBP: MD2.12 P1.9 | length 763.2
  Top Layer w8: P1.9 4135,3260 4390,3260 4570,3080 MD2.12@4752.91,3080
VBAT: BT1.1 C3.1 L1.1 MD1.4 U1.4 U1.5 | length 649.1
  Bottom Layer w50: MD1.4 4140,2345 4498.86,1986.14 4563.82,1986.14 BT1.1
pads on no net: H1.0 H2.0 H3.0 H4.0 J1.MH1 J1.MH2

## Polygon pours and split planes (outlines as drawn)
GND on Top Layer "NONET_L01_P013" (solid, remove dead copper, shelved, pour order 13): 3945,1740 ccw(c3995,1740) 3995,1690 5380,1690 ccw(c5380,1700) 5390,1700 cw(c5400,1700) 5400,1710 5890,1710 cw(c5890,1700) 5900,1700 ccw(c5910,1700) 5910,1690 6285.25,1690 ccw(c6285.25,1740) 6335.25,1740 6335.25,4205 ccw(c6285.25,4205) 6285.25,4255 3995,4255 ccw(c3995,4205) 3945,4205
VBAT on Top Layer "VBAT_L01_P001" (solid, remove dead copper, pour order 1): 4277.5,2100 4315,2062.5 4315,1935 4610,1935 4610,2045 4385,2045 4385,2115 4350,2115 4305,2160 4305,2230 4335,2230 4335,2425 4240,2425 4240,2100
NetD1_1 on Top Layer "NETD1_1_L01_P002" (solid, remove dead copper, pour order 2): 4395,2160 4395,2440 4625,2440 4625,2330 4530,2330 4460,2260 4460,2160
3V3 on Top Layer "3V3_L01_P008" (solid, remove dead copper, pour order 8): 4985,2045 4985,2130 4950,2130 4950,2365 5235,2365 5235,2505 5300,2505 5300,2315 5300,2310 5080,2310 5080,2130 5045,2130 5045,2045
5V on Top Layer "5V_L01_P005" (solid, remove dead copper, pour order 5): 5130,1785 5205,1785 5205,1940 5230,1965 5230,2080 5205,2105 5080,2105 5080,2045 5150,2045 5170,2025 5170,1990 5130,1950
5V_BAT on Top Layer "5V_BAT_L01_P003" (solid, remove dead copper, pour order 3): 4527.66,2271.22 4623.78,2271.22 4770,2125 4770,2010 4900,2010 4975,2010 5105,1880 5105,1785 4990,1785 4990,1880 4910,1960 4805,1960 4770,1925 4700,1925 4700,2105 4645,2160 4527.66,2160
GND on Bottom Layer "NONET_L02_P009" (solid, remove dead copper, shelved, pour order 9): 3945,1740 ccw(c3995,1740) 3995,1690 5380,1690 ccw(c5380,1700) 5390,1700 cw(c5400,1700) 5400,1710 5890,1710 cw(c5890,1700) 5900,1700 ccw(c5910,1700) 5910,1690 6285.25,1690 ccw(c6285.25,1740) 6335.25,1740 6335.25,4205 ccw(c6285.25,4205) 6285.25,4255 3995,4255 ccw(c3995,4205) 3945,4205
3V3 on Bottom Layer "3V3_L02_P006" (solid, remove dead copper, pour order 6): 5235,2505 5300,2505 5300,2400 5235,2400

## Keep-outs
Top Layer:
  rectangle: 5450,1710 5845,1975
Bottom Layer:
  rectangle: 5450,1710 5845,1975
Keep-Out Layer:
  lines w10: 6210,1690 ccw(c6210,1810) 6330,1810 6335.19,4135 ; 6242.61,1689.69 5910,1690 cw(c5910,1700) 5900,1700 ccw(c5890,1700) 5890,1710 5400,1710 ccw(c5400,1700) 5390,1700 cw(c5380,1700) 5380,1690 4065,1690 cw(c4065,1810) 3945,1810 3945,4135 cw(c4065,4135) 4065,4255 6215,4255 cw(c6215,4135) 6335,4135

## Other copper
Top Layer:
  pour cut-out: 6255,3765 6045,3765 6045,2952.76 6150,2952.76 6150,3062.52 6255,3062.52
  pour cut-out: 4030,3765 4240,3765 4240,2952.76 4135,2952.76 4135,3155 4030,3155
  pour cut-out: 4750,2950 5560,2950 5560,4260 4750,4260
Bottom Layer:
  pour cut-out: 6255,3765 6045,3765 6045,2952.76 6150,2952.76 6150,3062.52 6255,3062.52
  pour cut-out: 4030,3765 4240,3765 4240,2952.76 4135,2952.76 4135,3155 4030,3155
  pour cut-out: 4750,2950 5560,2950 5560,4260 4750,4260

## Silkscreen, mask and mechanical layers (free items; w line width, h text height)
Top Overlay:
  lines w10: 6237.03,2315.39 cw(c6237.19,2315.39) 6237.19,2315.55 ; 6253.94,2464.84 6253.94,2695.16 6304.84,2695.16 ; 6254.09,2465 6305,2465 6305,2695 ; 6279.84,2470.16 cw(c6279.84,2470) 6280,2470
  text "TMS" at 3950,3685 h40
  text "TCK" at 4240,3685 h40
  text "PD4" at 5965,3685 h40
  text "PD3" at 6255,3685 h40
  text "CC2538+CC2592 Module" at 4750,3650 h40 r90
  text "TDO" at 3950,3585 h40
  text "TDI" at 4240,3585 h40
  text "PD1" at 5965,3585 h40
  text "PD0" at 6255,3585 h40
  text "PB4" at 3950,3485 h40
  text "PB5" at 4240,3485 h40
  text "PA7" at 5965,3485 h40
  text "PA6" at 6255,3485 h40
  text "PB2" at 3950,3385 h40
  text "PB3" at 4240,3385 h40
  text "PA5" at 5965,3385 h40
  text "PA4" at 6255,3385 h40
  text "PA2" at 5965,3290 h40
  text "USB+" at 3948.45,3285 h40
  text "PB1" at 4240,3285 h40
  text "PC0" at 6255,3285 h40
  text "PC1" at 5963.45,3190 h40
  text "PB0" at 3950,3185 h40
  text "USB-" at 4240,3185 h40
  text "PC4" at 6255,3185 h40
  text "GND" at 3950,3085 h40
  text "3V3" at 4240,3085 h40
  text "PC5" at 5965,3085 h40
  text "PC6" at 6255,3085 h40
  text "GND" at 3950,2985 h40
  text "3V3" at 4240,2985 h40
  text "PC7" at 5965,2985 h40
  text "GND" at 6255,2985 h40
  text "SE" at 6306.16,2461.75 h40 r90
  text "PC5" at 5015,2435 h40 r90
  text "PC4" at 5090,2435 h40 r90
  text "LED2" at 5165,2435 h40 r90
  text "LED1" at 5240,2435 h40 r90
  text "RED" at 5240,2355 h40 r90
  text "YELLOW" at 5165,2301.56 h40 r90
  text "LED 3V3" at 5416.38,2227.94 h40 r90
  text "RESET" at 6300,2100 h40 r90
  text "LED 5V" at 5416.38,2042.94 h40 r90
  text "BAT" at 5020,1905 h40
  text "USB" at 5225,1905 h40
  text "USB MicroB" at 5474.24,1735.76 h40 r90

## Text inside footprints (layer, text, board x,y; h text height)
BT1: Mechanical 13 "+" at 4600,1862.48 h70 r90; Bottom Overlay "-" at 4917.14,4220.72 h200 r180; Bottom Overlay "+" at 5010,2025 h200 r90
C1: Top Overlay "+" at 4795,2010 h20 r90
C3: Top Overlay "+" at 4440,2015 h20 r90
D2: Top Overlay "+" at 5330,2220 h20
D3: Top Overlay "+" at 5347.61,2195.44 h20 r180
D4: Top Overlay "+" at 5810,2450 h30 r270
D5: Top Overlay "+" at 5810,2620 h30 r270
D6: Top Overlay "+" at 5189.25,2652.24 h20 r180
D7: Top Overlay "+" at 5114.25,2652.24 h20 r180
D8: Top Overlay "+" at 5039.25,2652.24 h20 r180
D9: Top Overlay "+" at 4965,2655 h20 r180
J1: Top Courtyard "PCB Edge" at 5593.82,1680.08 h16
MD1: Top Overlay "GND" at 3985,2285 h40 r270; Top Overlay "GND" at 3985,2185 h40 r270; Top Overlay "BAT" at 3985,2385 h40 r270; Top Overlay "VIN" at 3985,2085 h40 r270
SW2: Top Overlay "ON" at 6165,2410 h40 r90; Top Component Outline "ON" at 6226.5,2517.01 h40 r180